# EAGLE board butter (EAGLE 6.5.0)
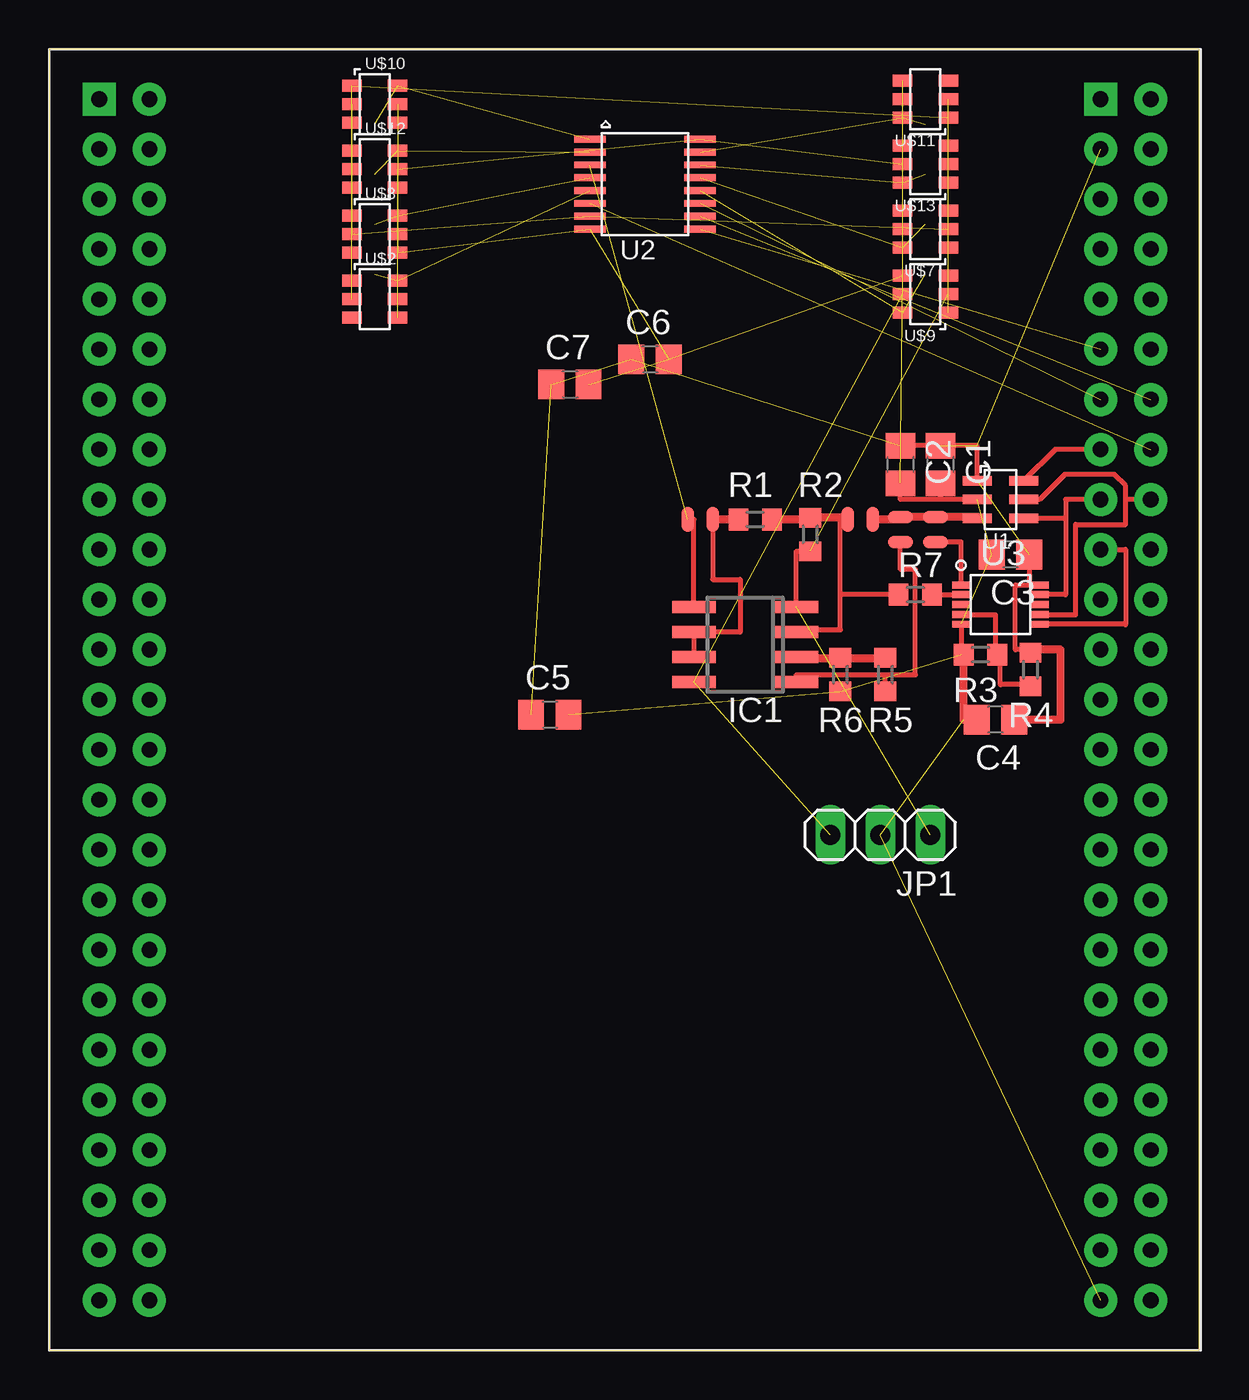
[diagram p0: board, top side]
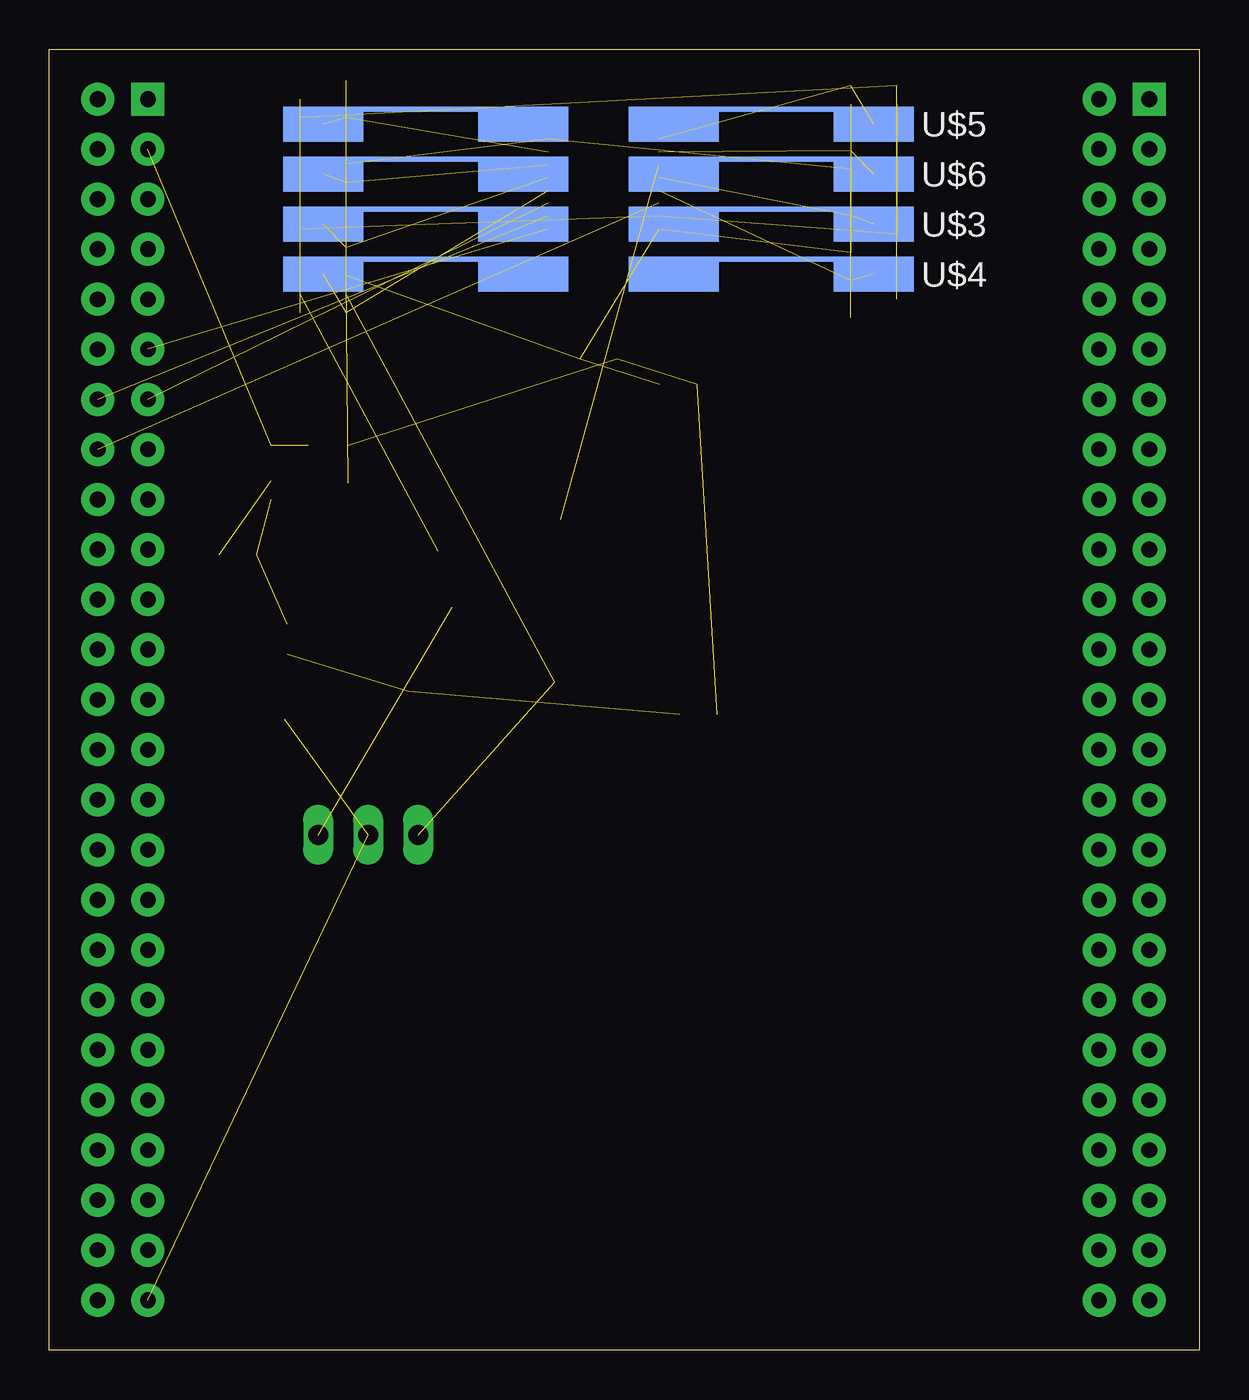
[diagram p1: board, bottom side, seen from below]

Size 58.34 x 66.03 mm. Coordinates in mm from the lower left corner, seen from the top.
Outline: 0,0 58.34,0 58.34,66.03 0,66.03 0,0
Copper layers (1*16): Top 0.035mm / dielectric 1.5mm / Bottom 0.035mm
Design rules "default *": minimum track width 10mil, minimum drill 24mil, track to track 10mil, track to pad 10mil, pad to pad 8mil, via to via 8mil, smd to smd 8mil, copper to edge 40mil, drill to drill 8mil, minimum pad ring 10mil, minimum via ring 8mil, stop-mask expansion 4mil, vias tented up to drill 0mil, thermal gap 10mil

## Footprints (pad centres in the part's own frame; a part is rotated, then mirrored left to right if it is on the bottom)
C0805 = smd 1.3 x 1.5: 1 -0.95,0; 2 0.95,0
SO08 = smd 0.6 x 2.2: 1 -1.905,-2.6; 2 -0.635,-2.6; 3 0.635,-2.6; 4 1.905,-2.6; 5 1.905,2.6; 6 0.635,2.6; 7 -0.635,2.6; 8 -1.905,2.6
JMP = smd 0.635 x 1.27: P$1 -0.635,0; P$2 0.635,0
1X03 = drill 1.016 long: 1 -2.54,0; 2 0,0; 3 2.54,0
R0603 = smd 1 x 1.1: 1 -0.85,0; 2 0.85,0
SOT-23-6 = smd 1.473 x 0.483: P$1 -1.181,0.95; P$2 -1.181,0; P$3 -1.181,-0.95; P$4 1.181,-0.95; P$5 1.181,0; P$6 1.181,0.95
TSSOP-16 = smd 1.6 x 0.35: P$1 -2.8,2.275; P$2 -2.8,1.625; P$3 -2.8,0.975; P$4 -2.8,0.325; P$5 -2.8,-0.325; P$6 -2.8,-0.975; P$7 -2.8,-1.625; P$8 -2.8,-2.275; P$9 2.8,-2.275; P$10 2.8,-1.625; P$11 2.8,-0.975; P$12 2.8,-0.325; P$13 2.8,0.325; P$14 2.8,0.975; P$15 2.8,1.625; P$16 2.8,2.275
MSOP-10 = smd 0.9 x 0.35: P$1 -2,1; P$2 -2,0.5; P$3 -2,0; P$4 -2,-0.5; P$5 -2,-1; P$6 2,-1; P$7 2,-0.5; P$8 2,0; P$9 2,0.5; P$10 2,1
STM32F4-DISCOVERY = drill 0.8 pad 1.676 square: P$1 -27.94,30.48; P$51 22.86,30.48 | drill 0.8 pad 1.676: P$2 -25.4,30.48; P$3 -27.94,27.94; P$4 -25.4,27.94; P$5 -27.94,25.4; P$6 -25.4,25.4; P$7 -27.94,22.86; P$8 -25.4,22.86; P$9 -27.94,20.32; P$10 -25.4,20.32; P$11 -27.94,17.78; P$12 -25.4,17.78; P$13 -27.94,15.24; P$14 -25.4,15.24; P$15 -27.94,12.7; P$16 -25.4,12.7; P$17 -27.94,10.16; P$18 -25.4,10.16; P$19 -27.94,7.62; P$20 -25.4,7.62; P$21 -27.94,5.08; P$22 -25.4,5.08; P$23 -27.94,2.54; P$24 -25.4,2.54; P$25 -27.94,0; P$26 -25.4,0; P$27 -27.94,-2.54; P$28 -25.4,-2.54; P$29 -27.94,-5.08; P$30 -25.4,-5.08; P$31 -27.94,-7.62; P$32 -25.4,-7.62; P$33 -27.94,-10.16; P$34 -25.4,-10.16; P$35 -27.94,-12.7; P$36 -25.4,-12.7; P$37 -27.94,-15.24; P$38 -25.4,-15.24; P$39 -27.94,-17.78; P$40 -25.4,-17.78; P$41 -27.94,-20.32; P$42 -25.4,-20.32; P$43 -27.94,-22.86; P$44 -25.4,-22.86; P$45 -27.94,-25.4; P$46 -25.4,-25.4; P$47 -27.94,-27.94; P$48 -25.4,-27.94; P$49 -27.94,-30.48; P$50 -25.4,-30.48; P$52 25.4,30.48; P$53 22.86,27.94; P$54 25.4,27.94; P$55 22.86,25.4; P$56 25.4,25.4; P$57 22.86,22.86; P$58 25.4,22.86; P$59 22.86,20.32; P$60 25.4,20.32; P$61 22.86,17.78; P$62 25.4,17.78; P$63 22.86,15.24; P$64 25.4,15.24; P$65 22.86,12.7; P$66 25.4,12.7; P$67 22.86,10.16; P$68 25.4,10.16; P$69 22.86,7.62; P$70 25.4,7.62; P$71 22.86,5.08; P$72 25.4,5.08; P$73 22.86,2.54; P$74 25.4,2.54; P$75 22.86,0; P$76 25.4,0; P$77 22.86,-2.54; P$78 25.4,-2.54; P$79 22.86,-5.08; P$80 25.4,-5.08; P$81 22.86,-7.62; P$82 25.4,-7.62; P$83 22.86,-10.16; P$84 25.4,-10.16; P$85 22.86,-12.7; P$86 25.4,-12.7; P$87 22.86,-15.24; P$88 25.4,-15.24; P$89 22.86,-17.78; P$90 25.4,-17.78; P$91 22.86,-20.32; P$92 25.4,-20.32; P$93 22.86,-22.86; P$94 25.4,-22.86; P$95 22.86,-25.4; P$96 25.4,-25.4; P$97 22.86,-27.94; P$98 25.4,-27.94; P$99 22.86,-30.48; P$100 25.4,-30.48
TSSOP-6 = smd 0.991 x 0.61: P$1 -1.161,0.94; P$2 -1.161,0; P$3 -1.161,-0.94; P$4 1.161,-0.94; P$5 1.161,0; P$6 1.161,0.94
RAIL = smd 14.478 x 0.254: P$1 -8.763,-0.762; P$2 8.763,-0.762 | smd 4.572 x 1.778: P$3 -3.81,0; P$4 3.81,0 | smd 4.064 x 1.778: P$L -13.97,0; P$R 13.97,0

## Placement (x,y rotation side)
C1  .1u  [C0805]  45.21,44.96 270 top
C2  1u  [C0805]  43.18,44.96 270 top
C3  .1u  [C0805]  48.77,40.39 180 top
C4  1u  [C0805]  48.01,32 180 top
C5  [C0805]  25.4,32.26 0 top
C6  .1u  [C0805]  30.48,50.29 0 top
C7  1u  [C0805]  26.42,49.02 0 top
IC1  TL072D  [SO08]  35.31,35.81 90 top
JMP1  [JMP]  33.02,42.16 180 top
JMP2  [JMP]  44.96,41.66 90 top
JMP3  [JMP]  41.15,42.16 180 top
JMP4  [JMP]  43.18,41.66 270 top
JP1  [1X03]  42.16,26.16 180 top
R1  [R0603]  35.81,42.16 180 top
R2  [R0603]  38.61,41.4 90 top
R3  [R0603]  47.24,35.31 0 top
R4  [R0603]  49.78,34.54 90 top
R5  [R0603]  42.42,34.29 90 top
R6  [R0603]  40.13,34.29 90 top
R7  [R0603]  43.94,38.35 0 top
U1  ADCS7477  [SOT-23-6]  48.26,43.18 0 top
U2  CD4051BPWR  [TSSOP-16]  30.23,59.18 0 top
U3  [MSOP-10]  48.26,37.85 0 top
U$1  STM32F4-DISCOVERY  [STM32F4-DISCOVERY]  30.48,33.02 0 top
U$2  DG467  [TSSOP-6]  16.51,53.34 0 top
U$3  RAILSEP  [RAIL]  30.48,57.15 180 bottom
U$4  RAILSEP  [RAIL]  30.48,54.61 180 bottom
U$5  RAILSEP  [RAIL]  30.48,62.23 180 bottom
U$6  RAILSEP  [RAIL]  30.48,59.69 180 bottom
U$7  DG467  [TSSOP-6]  44.45,56.9 180 top
U$8  DG467  [TSSOP-6]  16.51,56.64 0 top
U$9  DG467  [TSSOP-6]  44.45,53.59 180 top
U$10  DG467  [TSSOP-6]  16.51,63.25 0 top
U$11  DG467  [TSSOP-6]  44.45,63.5 180 top
U$12  DG467  [TSSOP-6]  16.51,59.94 0 top
U$13  DG467  [TSSOP-6]  44.45,60.2 180 top

## Library data of the parts
C1-C7 = rcl
IC1 = linear
JMP1-JMP4 U1-U3 U$2-U$13 = butter
JP1 = pinhead
R1-R7 = resistor
U$1 = STM32F4-DISCOVERY

## Nets
1S0: U2.P$11 U$1.P$63
1S1: U2.P$10 U$1.P$64
1S2: U2.P$9 U$1.P$61
!CS1: U1.P$6 U$1.P$65
!CSP1: U3.P$6 U$1.P$69
!E1: U2.P$6 U$1.P$66
+5V: C1.1 C2.1 C3.1 C4.1 C5.1 C6.1 C7.1 R4.2 U1.P$1 U3.P$10 U$1.P$53
D1: U1.P$5 U3.P$7 U$1.P$68
GND: C1.2 C2.2 C3.2 C4.2 C5.2 C6.2 C7.2 JP1.2 R3.1 R6.1 U1.P$2 U2.P$8 U3.P$5 U$1.P$99 U$2.P$4 U$7.P$4 U$8.P$4 U$9.P$4 U$10.P$4 U$11.P$4 U$12.P$4 U$13.P$4
N$1: IC1.2 R5.2 R6.2
N$2: U2.P$13 U$3.P$R U$7.P$6
N$3: U2.P$5 U$2.P$6 U$4.P$L
N$4: IC1.5 JMP1.P$2 U2.P$3
N$5: JMP2.P$1 U3.P$1
N$6: IC1.6 IC1.7 JMP1.P$1 R1.2
N$7: U2.P$4 U$3.P$L U$8.P$6
N$8: U2.P$12 U$4.P$R U$9.P$6
N$9: U2.P$1 U$5.P$L U$10.P$6
N$10: U2.P$15 U$5.P$R U$11.P$6
N$11: U2.P$2 U$6.P$L U$12.P$6
N$12: U2.P$14 U$6.P$R U$13.P$6
N$13: U$2.P$3
N$14: U$8.P$3
N$15: U$10.P$3
N$16: U$12.P$3
N$17: U$7.P$3
N$18: U$9.P$3
N$19: U$11.P$3
N$20: U$13.P$3
N$21: U$2.P$1 U$7.P$1 U$8.P$1 U$9.P$1 U$10.P$1 U$11.P$1 U$12.P$1 U$13.P$1
N$22: IC1.3 JMP3.P$2 R1.1 R2.2 R7.1
N$23: R3.2 R4.1 U3.P$4
N$24: JMP2.P$2 JMP3.P$1 JMP4.P$1 U1.P$3
N$25: U3.P$8
N$26: IC1.1 JMP4.P$2 R5.1
N$27: R7.2 U3.P$2
SCK: U1.P$4 U3.P$9 U$1.P$67
VCC: IC1.8 JP1.3 U2.P$16 U$2.P$5 U$7.P$5 U$8.P$5 U$9.P$5 U$10.P$5 U$11.P$5 U$12.P$5 U$13.P$5
VEE: IC1.4 JP1.1 R2.1 U2.P$7 U$2.P$2 U$7.P$2 U$8.P$2 U$9.P$2 U$10.P$2 U$11.P$2 U$12.P$2 U$13.P$2

## Tracks (layer width: path | path; a pad name or v marks a point on that pad's centre or on a via)
1S0  (1 unrouted)
1S1  (1 unrouted)
1S2  (1 unrouted)
!CS1
  Top 0.254: U$1.P$65 51.03,45.72 U1.P$6
!CSP1
  Top 0.254: U$1.P$69 54.61,40.64 54.61,36.85 | 54.61,36.83 54.61,36.85 | 54.61,36.85 U3.P$6
!E1  (1 unrouted)
+5V  (6 unrouted)
  Top 0.254: 49.78,35.56 49.02,35.56 49.02,38.85 U3.P$10 49.72,38.85 C3.1 | U1.P$1 47.08,45.91 C2.1
  Top 0.406: C4.1 51.31,32 51.31,35.56 49.78,35.56 R4.2
D1
  Top 0.254: U$1.P$68 54.61,43.18 | 54.61,43.18 54.61,43.88 54.04,44.45 51.52,44.45 50.25,43.18 U1.P$5 | U3.P$7 50.26,37.34 52.07,37.34 52.07,41.91 54.61,41.91 54.61,43.18
GND  (17 unrouted)
  Top 0.254: U3.P$5 46.26,35.31 R3.1 | U1.P$2 45.21,43.18 | 45.21,43.18 43.18,43.18 C2.2 | C1.2 45.21,43.18
  Top 0.406: C4.2 46.39,32 R3.1
N$1
  Top 0.406: IC1.2 37.91,35.14 R6.2 R5.2
N$2  (2 unrouted)
N$3  (2 unrouted)
N$4  (1 unrouted)
  Top 0.254: IC1.5 32.71,42.16 JMP1.P$2
N$5
  Top 0.254: U3.P$1 46.26,41.02 JMP2.P$1
N$6
  Top 0.254: JMP1.P$1 33.66,39.12 35.05,39.12 35.05,36.45 IC1.6 IC1.7
  Top 0.406: R1.2 JMP1.P$1
N$7  (2 unrouted)
N$8  (2 unrouted)
N$9  (2 unrouted)
N$10  (2 unrouted)
N$11  (2 unrouted)
N$12  (2 unrouted)
N$21  (7 unrouted)
N$22
  Top 0.254: IC1.3 37.91,36.58 40.13,36.58 40.13,38.35 | 40.13,38.35 40.13,42.16 JMP3.P$2 | R7.1 40.13,38.35
  Top 0.406: JMP3.P$2 40.51,42.25 R2.2 38.61,42.16 R1.1
N$23
  Top 0.254: U3.P$4 46.26,37.34 48.01,37.34 48.01,35.31 R3.2 48.26,35.31 48.26,33.78 49.78,33.78 R4.1
N$24
  Top 0.406: U1.P$3 47.08,42.29 JMP2.P$2 JMP4.P$1 43.18,42.16 JMP3.P$1
N$26
  Top 0.254: IC1.1 37.91,34.29 42.42,34.29 | R5.1 42.42,34.29 | 42.42,34.29 43.94,34.29 43.94,39.62 43.18,39.62 JMP4.P$2
N$27
  Top 0.254: R7.2 U3.P$2
SCK
  Top 0.254: U1.P$4 51.56,42.23 | 51.56,42.23 51.56,38.35 U3.P$9 | U$1.P$67 51.56,43.18 51.56,42.23
VCC  (10 unrouted)
VEE  (10 unrouted)
  Top 0.254: IC1.4 37.91,40.55 R2.1